# Altium PCB PA-15-30W.PcbDoc
Units mm, origin at the board's own origin, x right, y up, seen from the top; angles counter-clockwise.
Board outline 100 x 100 mm, 2 copper layers (Top Layer, Bottom Layer), stack 1.571 mm thick; 168 components, 113 nets, 477 pads, 0 vias.
Unrouted connection lines stored in the file: 358.
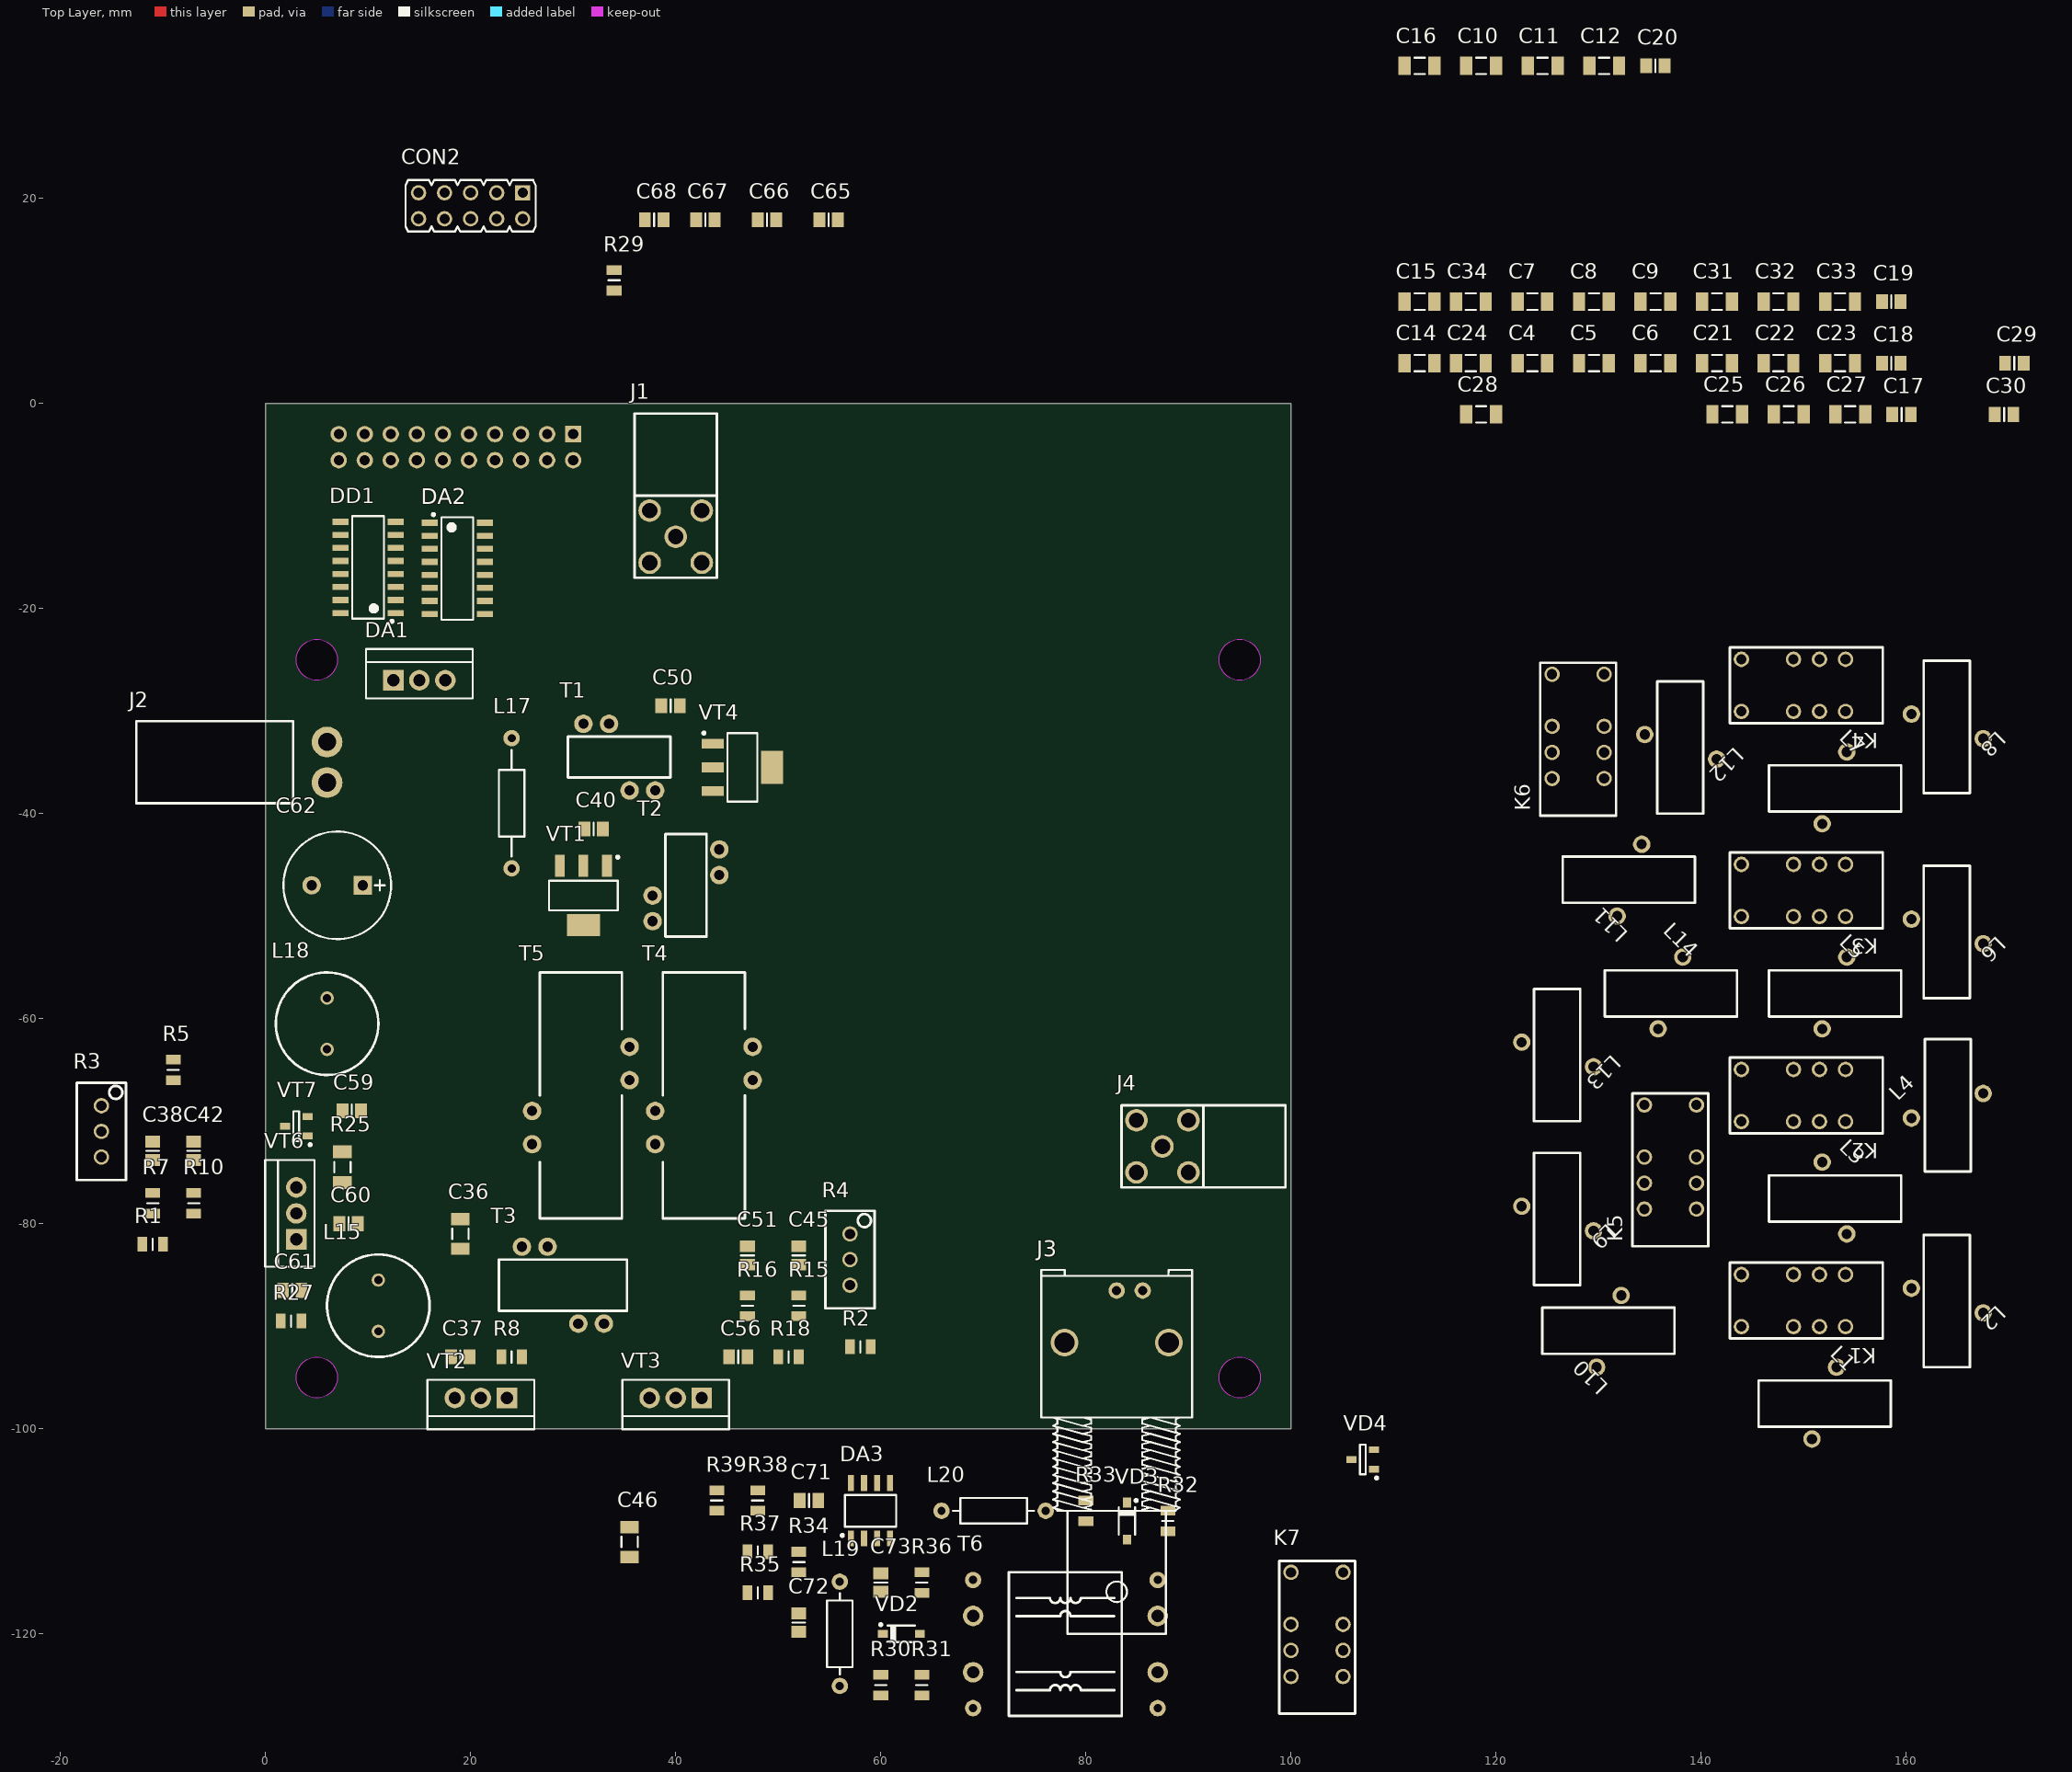
[diagram p0: Top Layer view]
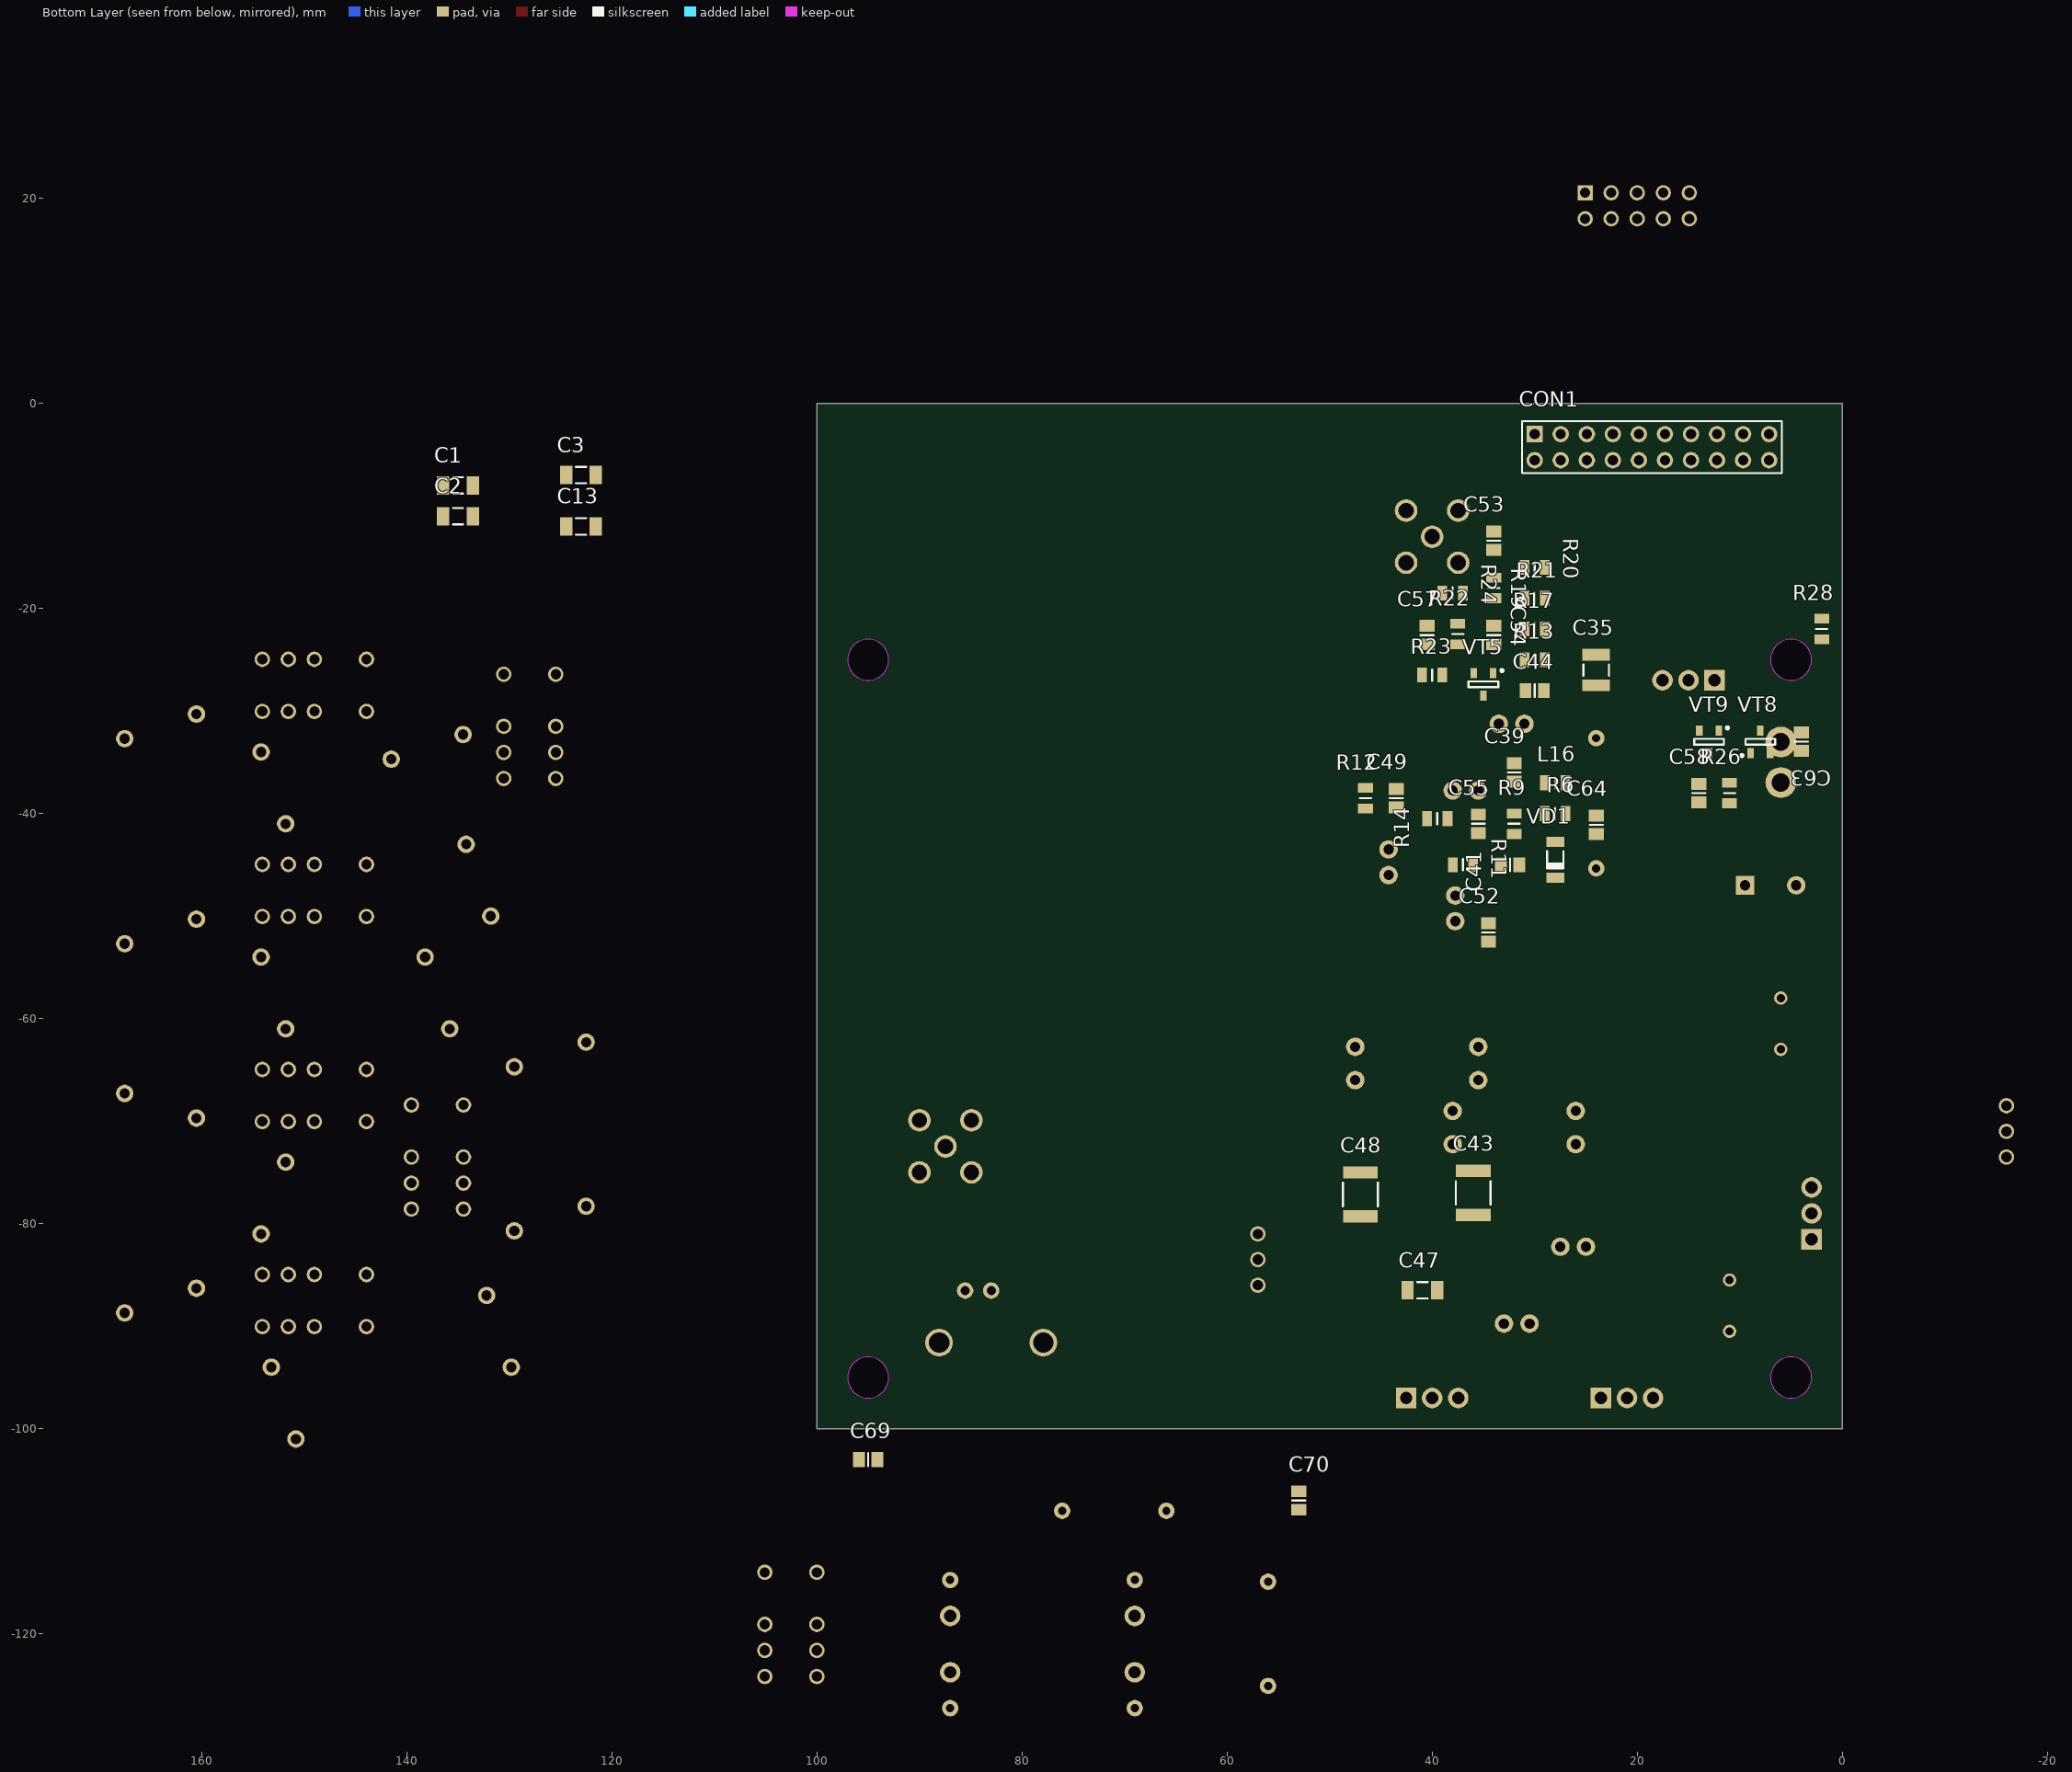
[diagram p1: Bottom Layer view, seen from below]

## Layer stack, top to bottom
Top Solder: solder mask 0.0102, Solder Resist, Dk 3.8
Top Layer: signal copper 0.0356
Dielectric 1: dielectric 1.5, FR-4, Dk 4.5
Bottom Layer: signal copper 0.0356
Bottom Solder: solder mask 0.0102, Solder Resist, Dk 3.8

## Board outline
0,0 100,0 100,-100 0,-100 0,-9.7
cut-out: 95,-27 cw(c95,-25) 93,-25 cw(c95,-25) 95,-23 cw(c95,-25) 97,-25 cw(c95,-25)
cut-out: 95,-97 cw(c95,-95) 93,-95 cw(c95,-95) 95,-93 cw(c95,-95) 97,-95 cw(c95,-95)
cut-out: 5,-97 cw(c5,-95) 3,-95 cw(c5,-95) 5,-93 cw(c5,-95) 7,-95 cw(c5,-95)
cut-out: 5,-27 cw(c5,-25) 3,-25 cw(c5,-25) 5,-23 cw(c5,-25) 7,-25 cw(c5,-25)

## Design rules (kind name [scope] priority, off if disabled: settings)
Clearance [All] p1: gap=0.254 ignorepadtopadclearanceinfootprint=FALSE except(0: Arc-Hole Track-Hole SMDPad-Hole THPad-Hole Via-Hole Fill-Hole Poly-Hole Region-Hole Text-Hole)
ComponentClearance ComponentClearance_Bln [InComponent('T4') vs InComponent('T5')] p1: gap=0 collisioncheckmode=3 verticalgap=0 showdistances=FALSE
ComponentClearance [All] p2: gap=1 collisioncheckmode=3 verticalgap=1 showdistances=TRUE donotcheckwithout3dbody=TRUE checkcomponentboundary=TRUE
PolygonConnect [All] p1: connectstyle=Relief reliefconductorwidth=0.254 reliefentries=4 polygonreliefangle="90 Angle" airgapwidth=0.254
RoutingVias [All] p1: holewidth=0.711 width=1.27 viastyle="Through Hole" minholewidth=0.711 minwidth=1.27 maxholewidth=0.711 maxwidth=1.27
SolderMaskExpansion [All] p1: expansion=0.102 istentingtop=FALSE
Width [All] p1: maxlimit=0.254 minlimit=0.254 preferedwidth=0.254
29 further rules are at their usual default settings.

## Classes and differential pairs
net class HF_LPF[0..5]: HF_LPF0 HF_LPF1 HF_LPF2 HF_LPF3 HF_LPF4 HF_LPF5
component class swr-antenna: C69 C70 C71 C72 C73 DA3 J3 J4 K7 L19 L20 R30 R31 R32 R33 R34 R35 R36 R37 R38 R39 T6 VD2 VD3 VD4
component class LPF: C1 C2 C3 C4 C5 C6 C7 C8 C9 C10 C11 C12 C13 C14 C15 C16 C17 C18 C19 C20 C21 C22 C23 C24 C25 C26 C27 C28 C29 C30 C31 C32 C33 C34 K1 K2 K3 K4 K5 K6 L1 L2 L3 L4 L5 L6 L7 L8 L9 L10 L11 L12 L13 L14
component class control-interface: C65 C66 C67 C68 CON1 CON2 DA2 DD1 R29
component class amplifier: C35 C36 C37 C38 C39 C40 C41 C42 C43 C44 C45 C46 C47 C48 C49 C50 C51 C52 C53 C54 C55 C56 C57 C58 C59 C60 C61 C62 C63 C64 DA1 J1 J2 L15 L16 L17 L18 R1 R2 R3 R4 R5 R6 R7 R8 R9 R10 R11 R12 R13 R14 R15 R16 R17 R18 R19 R20 R21 R22 R23 R24 R25 R26 R27 R28 T1 T2 T3 T4 T5 VD1 VT1 VT2 VT3 VT4 VT5 VT6 VT7 VT8 VT9

## Components (designator, comment, footprint, x,y, rotation, side; value= is the part's Value field where it differs from the comment)
C1 "1271" CAPC3216X125N 135,-8 r0 bottom
C2 "1100" CAPC3216X125N 135,-11 r180 bottom
C3 "1228" CAPC3216X125N 123,-7 r0 bottom
C4 "756.7" CAPC3216X125N 123.54,3.92 r0 top
C5 "1000" CAPC3216X125N 129.54,3.92 r0 top
C6 "386" CAPC3216X125N 135.54,3.92 r0 top
C7 "464.8" CAPC3216X125N 123.54,9.92 r0 top
C8 "470" CAPC3216X125N 129.54,9.92 r0 top
C9 "356.4" CAPC3216X125N 135.54,9.92 r0 top
C10 "288.9" CAPC3216X125N 118.54,32.92 r0 top
C11 "330" CAPC3216X125N 124.54,32.92 r0 top
C12 "199.1" CAPC3216X125N 130.54,32.92 r0 top
C13 "1271" CAPC3216X125N 123,-12 r180 bottom
C14 "756.7" CAPC3216X125N 112.54,3.92 r0 top
C15 "464.8" CAPC3216X125N 112.54,9.92 r0 top
C16 "288.9" CAPC3216X125N 112.54,32.92 r0 top
C17 "0.1uF" CAPC2013X100N 159.54,-1.08 r0 top
C18 "0.1uF" CAPC2013X100N 158.54,3.92 r0 top
C19 "0.1uF" CAPC2013X100N 158.54,9.92 r0 top
C20 "0.1uF" CAPC2013X100N 135.54,32.92 r0 top
C21 "106" CAPC3216X125N 141.54,3.92 r0 top
C22 "180" CAPC3216X125N 147.54,3.92 r0 top
C23 "8.5" CAPC3216X125N 153.54,3.92 r0 top
C24 "106" CAPC3216X125N 117.54,3.92 r0 top
C25 "171.8" CAPC3216X125N 142.54,-1.08 r0 top
C26 "220" CAPC3216X125N 148.54,-1.08 r0 top
C27 "94.6" CAPC3216X125N 154.54,-1.08 r0 top
C28 "171.8" CAPC3216X125N 118.54,-1.08 r0 top
C29 "0.1uF" CAPC2013X100N 170.54,3.92 r0 top
C30 "0.1uF" CAPC2013X100N 169.54,-1.08 r0 top
C31 "61.69" CAPC3216X125N 141.54,9.92 r0 top
C32 "100" CAPC3216X125N 147.54,9.92 r0 top
C33 "9.7" CAPC3216X125N 153.54,9.92 r0 top
C34 "61.69" CAPC3216X125N 117.54,9.92 r0 top
C35 "47uF" CAPC3225X270N 24,-26 r270 bottom
C36 "0.1uF" CAPC3216X125N 19,-81 r90 top
C37 "0.1uF" CAPC2013X100N 19,-93 r0 top
C38 "0.1uF" CAPC2013X100N -11,-72.9 r90 top
C39 "0.1uF" CAPC2013X100N 32,-36 r90 bottom
C40 "0.1uF" CAPC2013X100N 32,-41.5 r0 top
C41 "0.1uF" CAPC2013X100N 32.4,-45 r180 bottom
C42 "0.1uF" CAPC2013X100N -7,-72.9 r90 top
C43 "0.1uF" CAPC4532X218N 36,-77 r90 bottom
C44 "0.1uF" CAPC2013X100N 30,-28 r180 bottom
C45 "0.1uF" CAPC2013X100N 52,-83.1 r270 top
C46 "0.1uF" CAPC3216X125N 35.5,-111.05 r270 top
C47 "180*" CAPC3216X125N 40.95,-86.5 r180 bottom
C48 "0.1uF" CAPC4532X218N 47,-77.15 r90 bottom
C49 "0.1uF" CAPC2013X100N 43.5,-38.5 r90 bottom
C50 "0.1uF" CAPC2013X100N 39.5,-29.5 r180 top
C51 "0.1uF" CAPC2013X100N 47,-83.1 r90 top
C52 "0.1uF" CAPC2013X100N 34.5,-51.6 r270 bottom
C53 "0.1uF" CAPC2013X100N 34,-13.4 r270 bottom
C54 "0.1uF" CAPC2013X100N 34,-22.6 r270 bottom
C55 "0.1uF" CAPC2013X100N 35.5,-41 r270 bottom
C56 "0.1uF" CAPC2013X100N 46.1,-93 r0 top
C57 "0.1uF" CAPC2013X100N 40.5,-22.6 r270 bottom
C58 "0.1uF" CAPC2013X100N 14,-38 r90 bottom
C59 "0.1uF" CAPC2013X100N 8.4,-69 r0 top
C60 "0.1uF" CAPC2013X100N 8.1,-80 r0 top
C61 "0.1uF" CAPC2013X100N 2.6,-86.5 r0 top
C62 "100uF" CAPPR500-1050X1300 7,-47 r180 top
C63 "0.1uF" CAPC2013X100N 4,-33 r90 bottom
C64 "0.1uF" CAPC2013X100N 24,-41.1 r90 bottom
C65 "2.2uF" CAPC2013X100N 54.9,17.9 r180 top
C66 "0.1uF" CAPC2013X100N 48.9,17.9 r180 top
C67 "0.1uF" CAPC2013X100N 42.9,17.9 r180 top
C68 "2.2uF" CAPC2013X100N 37.9,17.9 r180 top
C69 "0.1uF" CAPC2013X100N 95,-103 r180 bottom
C70 "10uF" CAPC2013X100N 53,-107 r90 bottom
C71 "0.1uF" CAPC2013X100N 53,-107 r0 top
C72 "0.1uF" CAPC2013X100N 52,-118.9 r270 top
C73 "0.1uF" CAPC2013X100N 60,-115 r270 top
CON1 "PBD-20" PBD-20 18.57,-4.27 r180 bottom locked
CON2 "PLD-10" PLD-10 20,19.27 r180 top
DA1 "7809" TO-220-v 15,-27 r0 top
DA2 "ULN2003A" SOIC127P600X175-16N 18.7,-16.095 r0 top
DA3 "LM358" SOIC127P600X175-8N 59,-108 r90 top
DD1 "74HCT595D" SOIC127P600X175-16N 10,-16 r180 top
J1 "SMA001" SMA002 40,-13 r0 top
J2 "PWL-2" PWL-2R 6,-35 r90 top
J3 "BNC" BNC-TYCO_1-1337542-0 83,-92 r270 top
J4 "SMA002" SMA002 87.46,-72.46 r270 top
K1 "G6S-2-12VDC" G6S-2 149,-87.5 r90 top
K2 "G6S-2-12VDC" G6S-2 149,-67.5 r90 top
K3 "G6S-2-12VDC" G6S-2 149,-47.5 r90 top
K4 "G6S-2-12VDC" G6S-2 149,-27.5 r90 top
K5 "G6S-2-12VDC" G6S-2 137,-73.5 r0 top
K6 "G6S-2-12VDC" G6S-2 128,-31.5 r0 top
K7 "G6S-2-12VDC" G6S-2 102.54,-119.08 r0 top
L1 "4.375u" "T50-2 - VAR2" 152,-97.5 r180 top
L2 "4.375u" "T50-2 - VAR2" 164,-87.5 r90 top
L3 "2.604uH" T50-2 153,-77.5 r180 top
L4 "2.604uH" T50-2 164,-68.5 r270 top
L5 "1.5uH" "T50-6 - VAR2" 153,-57.5 r180 top
L6 "1.5uH" "T50-6 - VAR2" 164,-51.5 r90 top
L7 "994.9nH" "T50-6 - VAR2" 153,-37.5 r180 top
L8 "994.9nH" "T50-6 - VAR2" 164,-31.5 r90 top
L9 "342.2nH" "T50-6 - VAR2" 126,-79.5 r90 top
L10 "342.2nH" "T50-6 - VAR2" 131,-90.5 r0 top
L11 "591.3nH" "T50-6 - VAR2" 133,-46.5 r0 top
L12 "591.3nH" "T50-6 - VAR2" 138,-33.5 r90 top
L13 "199.1nH" "T50-6 - VAR2" 126,-63.5 r90 top
L14 "199.1nH" "T50-6 - VAR2" 137,-57.5 r180 top
L15 "4.7uH" "Inductor radial" 11,-88 r90 top
L16 "10uH" RESC2013X64N 28,-37 r180 bottom
L17 "3.3uH" RES1270-650X250 24,-39 r90 top
L18 "4.7uH" "Inductor radial" 6,-60.5 r270 top
L19 "100uH" RES1016-650X250 56,-120 r270 top
L20 "100uH" RES1016-650X250 71,-108 r180 top
R1 "2.2k" RESC2013X64N -11,-82 r0 top
R2 "2.2k" RESC2013X64N 58,-92 r0 top
R3 "4.7k" 3296W -16,-71 r270 top
R4 "4.7k" 3296W 57,-83.5 r270 top
R5 "6.8k" RESC2013X64N -9,-65 r90 top
R6 "330" RESC2013X64N 28,-40 r180 bottom
R7 "1k" RESC2013X64N -11,-78 r90 top
R8 "330" RESC2013X64N 24,-93 r180 top
R9 "330" RESC2013X64N 32,-41 r270 bottom
R10 "3.3*" RESC2013X64N -7,-78 r90 top
R11 "560" RESC2013X64N 37,-45 r0 bottom
R12 "560" RESC2013X64N 46.5,-38.5 r270 bottom
R13 "4.7k" RESC2013X64N 30,-25 r180 bottom
R14 "330" RESC2013X64N 39.5,-40.5 r180 bottom
R15 "1k" RESC2013X64N 52,-88 r90 top
R16 "3.3*" RESC2013X64N 47,-88 r90 top
R17 "330" RESC2013X64N 30,-22 r180 bottom
R18 "330" RESC2013X64N 51,-93 r0 top
R19 "0" RESC2013X64N 34,-18 r270 bottom
R20 "*" RESC2013X64N 30,-16 r0 bottom
R21 "*" RESC2013X64N 30,-19 r0 bottom
R22 "1k" RESC2013X64N 37.5,-22.5 r270 bottom
R23 "33" RESC2013X64N 40,-26.5 r180 bottom
R24 "47" RESC2013X64N 38,-18.5 r0 bottom
R25 "0.125" RESC3216X80N 7.5,-74.5 r90 top
R26 "100k" RESC2013X64N 11,-38 r270 bottom
R27 "4.7k" RESC2013X64N 2.5,-89.5 r0 top
R28 "100k" RESC2013X64N 2,-22 r270 bottom
R29 "10k" RESC2013X64N 34,12 r90 top
R30 "2.2k" RESC2013X64N 60,-125 r90 top
R31 "50" RESC2013X64N 64,-125 r90 top
R32 "50" RESC2013X64N 88,-109 r270 top
R33 "2.2k" RESC2013X64N 80,-108 r90 top
R34 "100" RESC2013X64N 52,-113 r90 top
R35 "22k" RESC2013X64N 48,-116 r0 top
R36 "22k" RESC2013X64N 64,-115 r270 top
R37 "*" RESC2013X64N 48,-112 r0 top
R38 "100" RESC2013X64N 48,-107 r90 top
R39 "*" RESC2013X64N 44,-107 r90 top
T1 "R10*6*4 N87" R10x6x4 34.5,-34.5 r0 top
T2 "R10*6*4 N87" R10x6x4 41,-47 r90 top
T3 "R12,5*7,5*5 N87" R12.5x7.5x5 29,-86 r0 top
T4 "TP4A-T22/14/6-C TDG" R22x14x6 42.75,-67.5 r270 top
T5 "TP4A-T22/14/6-C TDG" R22x14x6 30.75,-67.5 r90 top
T6 "BN43-302" TANDEM 78,-121 r0 top
VD1 "LL4148" DIOMELF3515N 28,-44.5 r90 bottom
VD2 "BAT46ZFILM" SOD3816X118N 62,-120 r0 top
VD3 "BAT46ZFILM" SOD3816X118N 84,-109 r270 top
VD4 "BAT54SL" SOT95P229X119-3N 107,-103 r180 top
VT1 "BFG591" SOT230P700X180-4N 31,-48 r270 top
VT2 "RD15HVF1" TO-220-v 21,-97 r180 top
VT3 "RD15HVF1" TO-220-v 40,-97 r180 top
VT4 "BFG591" SOT230P700X180-4N 46.5,-35.5 r0 top
VT5 "BFR93A" SOT95P229X119-3N 35,-27.4 r270 bottom
VT6 "IRF4905" TO-220-v 3,-79 r90 top
VT7 "MMBT3906" SOT95P229X119-3N 3,-70.5 r180 top
VT8 "IRLML9301TRP" SOT95P229X119-3N 8,-33 r90 bottom
VT9 "NX7002AK" SOT95P229X119-3N 13,-33 r270 bottom

## Footprints (in the part's own frame and the unit in brackets; to place one, negate y for a bottom-side part, rotate by r counter-clockwise, add the part's x,y. Pads: shape width x height; smd on the part's side, far side on the other; paste and mask are expansions set on the pad)
3296W [mm] "Square Trimming Potentiometer"
  round 1.5 hole 1: 1(-2.5,0) 2(0,0) 3(2.5,0)
  silkscreen extent -4.75,-2.4 4.75,2.4, body extent -4.76,-2.43 4.76,2.4, height 7.12
BNC-TYCO_1-1337542-0 [mm] "50 Ohms  BNC Elbow PCB Socket With Mounting Posts"
  round 1.6 hole 0.9: 1(-5.48,0) 2(-5.48,2.54)
  round 2.7 hole 2: 3(-0.4,5.08) 3(-0.4,-5.08)
  silkscreen extent -7.5,-7.35 28,7.35, body extent -7.5,-7.35 28,7.35, height 13.16
CAPC2013X100N [mm] "Capacitor, Non-Polarized, Chip; 2.00mm L X 1.25mm W X 0.9mm H, IPC Medium Density"
  rect 1.15x1.45 smd: 1(-0.9,0) 2(0.9,0)
  silkscreen extent 0,-0.63 0,0.63, body extent -1.1,-0.72 1.1,0.73, height 1
CAPC3216X125N [mm] "Capacitor, Non-Polarized, Chip; 3.20mm L X 1.60mm W X 1.25mm H, IPC Medium Density"
  rect 1.2x1.8 smd: 1(-1.45,0) 2(1.45,0)
  silkscreen extent -0.5,-0.8 0.5,0.8, body extent -1.7,-0.9 1.7,0.9, height 1.25
CAPC3225X270N [mm] "Chip Capacitor, Body 3.2x2.5mm, IPC Medium Density"
  rect 1.15x2.7 smd: 1(-1.5,0) 2(1.5,0)
  silkscreen extent -0.55,-1.25 0.55,1.25, body extent -1.7,-1.35 1.7,1.35, height 2.7
CAPC4532X218N [mm] "Chip Capacitor, 2-Leads, Body 4.5x3.2mm, IPC Medium Density"
  rect 1.2x3.4 smd: 1(-2.15,0) 2(2.15,0)
  silkscreen extent -1.15,-1.7 1.15,1.7, body extent -2.37,-1.7 2.38,1.7, height 2.18
CAPPR500-1050X1300 [mm] "Capacitor, Radial, Pin spacing 5.0mm - Body Diameter 10mm (nom) X Body Height 13mm (max)"
  rect 1.8x1.8 hole 1: 1(-2.5,0)
  round 1.8 hole 1: 2(2.5,0)
  silkscreen extent -5.25,-5.25 5.25,5.25, body extent -5.25,-5.25 5.25,5.25, height 13
DIOMELF3515N [mm] "SOD80C, MELF Diode, 2-Leads, Body 3.5x1.5mm, IPC Medium Density"
  rect 1x1.75 smd: 1(-1.75,0) 2(1.75,0)
  silkscreen extent -0.85,-0.8 0.85,0.8, body extent -1.85,-0.8 1.85,0.8, height 1.6
G6S-2 [mm] "Compact, Industry-Standard 2-pole relay,  designed to switch 2A Signal Loads"
  round 1.5 hole 1: 1(-2.54,5.08) 3(-2.54,0) 4(-2.54,-2.54) 5(-2.54,-5.08) 8(2.54,-5.08) 9(2.54,-2.54) 10(2.54,0) 12(2.54,5.08)
  silkscreen extent -3.7,-8.7 3.7,6.2, body extent -3.65,-8.65 3.65,6.15, height 9.2
"Inductor radial" [mm] "5.0mm"
  round 1.3 hole 0.8: 1(-2.5,0) 2(2.5,0)
  silkscreen extent -5,-5 5,5, body extent -4.25,-4.25 4.25,4.25, height 11
PBD-20 [mm] "20 Contacts - Pitch 2.54mm - Top Entry, Dual Row Through Mount Receptacle"
  rect 1.6x1.6 hole 1: 1(-11.43,1.27)
  round 1.6 hole 1: 2(-11.43,-1.27) 3(-8.89,1.27) 4(-8.89,-1.27) 5(-6.35,1.27) 6(-6.35,-1.27) 7(-3.81,1.27) 8(-3.81,-1.27) 9(-1.27,1.27) 10(-1.27,-1.27) 11(1.27,1.27) 12(1.27,-1.27) 13(3.81,1.27) 14(3.81,-1.27) 15(6.35,1.27) 16(6.35,-1.27) 17(8.89,1.27) 18(8.89,-1.27) 19(11.43,1.27) 20(11.43,-1.27)
  silkscreen extent -12.66,-2.54 12.66,2.54, body extent -12.7,-2.54 12.7,2.54, height 8.5
PLD-10 [mm] "10 Contacts - Pitch 2.54mm - Dual Row Through Mount Straight Header (Post Lead = 6.35mm, Tail Lead 3.05mm, Insulator 1.52mm)"
  rect 1.5x1.5 hole 1: 1(-5.08,-1.27)
  round 1.5 hole 1: 2(-5.08,1.27) 3(-2.54,-1.27) 4(-2.54,1.27) 5(0,-1.27) 6(0,1.27) 7(2.54,-1.27) 8(2.54,1.27) 9(5.08,-1.27) 10(5.08,1.27)
  silkscreen extent -6.35,-2.51 6.35,2.51, body extent -6.35,-2.51 6.35,2.51, height 7.87
PWL-2R [mm] "PCB Connector; Rated Voltage: 50/250V AC.DC; Rated Current: 5A"
  round 3 hole 1.75: 1(-1.98,0) 2(1.98,0)
  silkscreen extent -4,3.3 4,18.6, body extent -3.96,-0.6 3.96,18.97, height 9.6
R10x6x4 [mm]
  round 1.8 hole 1: 1(1,-3.25) 2(3.5,-3.25) 3(-1,3.25) 4(-3.5,3.25)
  silkscreen extent -5,-2 5,2, body extent -5,-2 5,2, height 10
R12.5x7.5x5 [mm]
  round 1.8 hole 1: 1(1.5,-3.75) 2(4,-3.75) 3(-1.5,3.75) 4(-4,3.75)
  silkscreen extent -6.25,-2.5 6.25,2.5, body extent -6.25,-2.5 6.25,2.5, height 12.5
R22x14x6 [mm]
  round 1.8 hole 1: 1(1.5,-4.75) 2(4.75,-4.75) 3(-1.5,4.75) 4(-4.75,4.75)
  silkscreen extent -12,-4 12,4, body extent -11,-3 11,3, height 22
RES1016-650X250 [mm] "Resistor, Axial, Pad spacing 10.16 mm - Body Lengh 6.5mm X Body Diameter 2.5mm"
  round 1.6 hole 0.8: 1(-5.08,0) 2(5.08,0)
  silkscreen extent -3.95,-1.25 3.95,1.25, body extent -5.38,-1.27 5.38,1.26, height 2.51
RES1270-650X250 [mm] "Resistor, Axial, Pad spacing 10.16 mm - Body Lengh 6.6mm X Body Diameter 2.5mm"
  round 1.6 hole 0.8: 1(-6.35,0) 2(6.35,0)
  silkscreen extent -5.2,-1.25 5.2,1.25, body extent -6.65,-1.25 6.65,1.25, height 2.5
RESC2013X64N [mm] "Chip Resistor, EIA 0805, Metric 2013, Body 2.03x1.27mm, IPC Medium Density"
  rect 0.95x1.45 smd: 1(-1,0) 2(1,0)
  silkscreen extent 0,-0.55 0,0.55, body extent -1.02,-0.63 1.02,0.64, height 0.64
RESC3216X80N [mm] "Chip Resistor, EIA 1206, Metric 3216, Body 3.2x1.6mm, IPC Medium Density"
  rect 1.25x1.85 smd: 1(-1.5,0) 2(1.5,0)
  silkscreen extent -0.5,-0.8 0.5,0.8, body extent -1.67,-0.87 1.68,0.88, height 0.8
SMA002 [mm] "SMA Connector Series"
  round 2.2 hole 1.5: 1(0,0) 2(-2.54,-2.54) 2(-2.54,2.54) 2(2.54,-2.54) 2(2.54,2.54)
  silkscreen extent -4,-4 4,12, body extent -3.17,-3.17 3.17,11.63, height 9.97
SOD3816X118N [mm] "SOD Diode (SOD-123); 2.70mm W X 1.60mm L X 1.18mm H body, IPC Medium Density"
  rect 0.95x0.8 smd: 1(-1.8,0) 2(1.8,0)
  silkscreen extent -2.12,-0.8 1.35,1.02, body extent -1.95,-0.9 1.95,0.9, height 1.18
SOIC127P600X175-8N [mm] "SOIC 8, Pitch 1.27mm - Body 4x5mm, IPC Medium Density"
  rect 1.55x0.6 smd: 1(-2.7,1.905) 2(-2.7,0.635) 3(-2.7,-0.635) 4(-2.7,-1.905) 5(2.7,-1.905) 6(2.7,-0.635) 7(2.7,0.635) 8(2.7,1.905)
  silkscreen extent -2.52,-2.5 1.55,2.88, body extent -3.1,-2.5 3.1,2.5, height 1.75
SOIC127P600X175-16N [mm] "SOIC 16, Pitch 1.27mm - Body 4x10mm, IPC Medium Density"
  rect 1.55x0.6 smd: 1(-2.7,4.445) 2(-2.7,3.175) 3(-2.7,1.905) 4(-2.7,0.635) 5(-2.7,-0.635) 6(-2.7,-1.905) 7(-2.7,-3.175) 8(-2.7,-4.445) 9(2.7,-4.445) 10(2.7,-3.175) 11(2.7,-1.905) 12(2.7,-0.635) 13(2.7,0.635) 14(2.7,1.905) 15(2.7,3.175) 16(2.7,4.445)
  silkscreen extent -2.45,-5 1.55,5.37, body extent -3.1,-5 3.1,5, height 1.75
SOT95P229X119-3N [mm] "SOT23 3-Leads, 0.95mm pitch; 3 pin, 1.296mm W X 2.858mm L X 1.194mm H body, IPC Medium Density"
  rect 1x0.65 smd: 1(-1.1,0.95) 2(-1.1,-0.95) 3(1.1,0)
  silkscreen extent -1.48,-1.45 0.28,1.92, body extent -1.25,-1.5 1.25,1.5, height 1.19
SOT230P700X180-4N [mm] "SOT223, 2.30mm pitch; 3 pin, 3.70mm W X 6.70mm L, IPC Medium Density"
  rect 2.15x0.95 smd: 1(-2.9,2.3) 2(-2.9,0) 3(-2.9,-2.3)
  rect 2.15x3.25 smd: 4(2.9,0)
  silkscreen extent -3.87,-3.35 1.45,3.48, body extent -3.65,-3.35 3.65,3.35, height 1.81
T50-2 [mm]
  round 1.7 hole 1: 1(-1.2,3.5) 2(1.2,-3.5)
  silkscreen extent -6.5,-2.2 6.4,2.3, body extent -6.5,-2.3 6.5,2.3, height 13.08
"T50-2 - VAR2" [mm]
  round 1.7 hole 1: 1(-1.2,-3.5) 2(1.2,3.5)
  silkscreen extent -6.5,-2.2 6.4,2.3, body extent -6.5,-2.3 6.5,2.3, height 13.08
"T50-6 - VAR2" [mm]
  round 1.7 hole 1: 1(-1.2,-3.5) 2(1.2,3.5)
  silkscreen extent -6.5,-2.2 6.4,2.3, body extent -6.5,-2.3 6.5,2.3, height 13.08
TANDEM [mm]
  round 2 hole 1.2: 1(-9,2.75) 2(9,2.75) 7(-9,-2.75) 8(9,-2.75)
  round 1.6 hole 0.8: 3(-9,6.25) 4(9,6.25) 5(-9,-6.25) 6(9,-6.25)
  silkscreen extent -5.5,-7 5.5,7, body extent -5.12,-6.62 5.13,6.58, height 7.55
TO-220-v [mm] "TO-220 3-Terminal - Vertical Mount"
  rect 2x2 hole 1.2: 1(-2.54,0)
  round 2 hole 1.2: 2(0,0) 3(2.54,0)
  silkscreen extent -5.21,-1.78 5.21,3.05, body extent -5.27,-1.75 5.27,2.95, height 20.5

## Part data
C1 C2 C3 C4 C5 C6 C7 C8 C9 C10 C11 C12 C13 C14 C15 C16 C21 C22 C23 C24 C25 C26 C27 C28 C31 C32 C33 C34 C47: library part Cap1206, "Capacitor 3.2x1.6 mm"
C17 C18 C19 C20 C29 C30 C37 C38 C39 C40 C41 C42 C44 C45 C49 C50 C51 C52 C53 C54 C55 C56 C57 C58 C59 C60 C61 C63 C64 C65 C66 C67 C68 C69 C70 C71 C72 C73: library part Cap0805, "Capacitor 2x1.25 mm"
C35: library part Cap1210, "GRM32ER71A476KE15L"
C36 C46: library part Cap1206, "FM31X104K251EEG"
C43: library part Cap1812, "GRM43DR72J104KW01 (1812, X7R:EIA, 0.1uF, DC630V)"
C48: library part Cap1812, "GRM43DR72J104KW01(1812, X7R:EIA, 0.1uF, DC630V)"
C62: library part CapPolarized, "EEUFR1E471"
CON1: library part CONNECTOR-20
CON2: library part CONNECTOR-10
DA1: "Positive voltage regulator ICs"
DA2: "High Voltage, High Current / Darlington Transistor Arrays"
DA3: "Single Supply Dual / Operational Amplifiers"
DD1: "8-bit serial-in, serial or parallel-out shift register with output / latches; 3-state"
J1 J4: library part "RF Connector"
J2: library part PWR_CONNECTOR
J3: library part "RF Connector", "EM-BC028M-NGP-50"
K1 K2 K3 K4 K5 K6 K7: "Compact, Industry-Standard 2-pole relay"
L1 L2 L3 L4: library part Inductor, "T50-2"
L5 L6 L7 L8 L9 L10 L11 L12 L13 L14: library part Inductor, "T50-6"
L15 L18: library part Inductor, "Bochen, 4.7µH±10%, Idc=5.0А, Rdc мax=0.05"
L16: library part Inductor, "SMD 0805 50-100mA"
L17: library part Inductor, "3,3uH ±10% аксиальный дроссель 670mA 0,34Ohm (KLS18-EC36-3R3K-A – KLS)"
L19 L20: library part Inductor, "DLA100-MN Ferrocore"
R1 R2 R5 R6 R7 R8 R9 R10 R11 R12 R13 R14 R15 R16 R17 R18 R19 R20 R21 R22 R23 R24 R26 R27 R28 R29 R30 R31 R32 R33 R34 R35 R36 R37 R38 R39: library part Res0805
R3 R4: library part potentiometer
R25: library part Res0805, "8 items 1 Om in paralel,1206"
T1: library part "transformer type 2", "R10*6*4 N87 (В64290-L38-Х87-Epcos)"
T2: library part "transformer type 1", "R10*6*4 N87 (В64290-L38-Х87-Epcos)"
T3: library part "transformer type 1", "B64290-L44-X87-Epcos"
T4 T5: library part "transformer type 2"
T6: library part "tandem match"
VD1: library part DIODE
VD2 VD3: library part DIODE, "Small signal Schottky diodes"
VD4: library part DIODE-2-1A-3C-3A-2C
VT1 VT4: "NPN 7 GHz wideband transistor"
VT5: "NPN 6 GHz wideband transistor"
VT6: "HEXFET® Power MOSFET"
VT7: "MMBT3906LT1G, PNP General Purpose Amplifier"
VT9: library part "N-MOSFET 1G 2S 3D"

## Nets (pads, with @x,y where several pads share a name; then routed paths per layer and width w, separated by ;. In a path a pad name is that pad's centre, name@x,y a point inside that pad or via, vN(x,y) a via of type N, cw(c..) or ccw(c..) an arc to the next point about the centre after c; other vN are vias at no path point)
GND: C1.1 C2.1 C3.1 C4.1 C5.1 C6.1 C7.1 C8.1 C9.1 C10.1 C11.1 C12.1 C13.1 C14.1 C15.1 C16.1 C21.1 C22.1 C23.1 C24.1 C25.1 C26.1 C27.1 C28.1 C31.1 C32.1 C33.1 C34.1 C35.1 C36.2 C38.2 C39.2 C45.1 C46.1 C52.2 C55.2 C58.2 C59.2 C60.2 C62.2 C63.1 C64.1 C65.1 C66.1 C67.1 C68.1 C70.1 C71.1 C72.2 C73.1 CON1.1 CON1.3 CON1.5 CON1.7 CON1.9 CON1.11 CON1.13 CON1.15 CON2.5 CON2.7 DA1.2 DA2.8 DA3.4 DD1.8 DD1.13 J1.2 J2.2 J3.2 J4.2 R1.1 R2.1 R20.1 R21.1 R22.1 R23.1 R24.1 R27.2 R28.1 R31.1 R32.1 R35.1 R36.2 R37.1 R39.1 T5.4 T6.3 T6.5 VD1.1 VD4.1 VD4.2 VT1.1 VT1.3 VT2.2 VT3.2 VT4.1 VT4.3 VT9.2
HF_LPF0: C17.1 DA2.11 K1.12
HF_LPF1: C18.1 DA2.12 K2.12
HF_LPF2: C19.1 DA2.13 K3.12
HF_LPF3: C20.1 DA2.14 K4.12
HF_LPF4: C30.1 DA2.15 K6.12
HF_LPF5: C29.1 DA2.16 K5.12
HF_LPF_OUT: K5.3 T6.1
HF_PA_OUT: K1.4 T4.3
HF_TX/RX: C69.1 DA2.10 K7.12
HF_TX_ENA: CON1.10 CON2.8 DA2.1 R28.2 VT9.1
NetC1_2: C1.2 K1.5 L1.1
NetC2_2: C2.2 C3.2 L1.2 L2.1
NetC4_2: C4.2 K2.5 L3.2
NetC5_2: C5.2 C6.2 L3.1 L4.2
NetC7_2: C7.2 K3.5 L5.1
NetC8_2: C8.2 C9.2 L5.2 L6.1
NetC10_2: C10.2 K4.5 L7.1
NetC11_2: C11.2 C12.2 L7.2 L8.1
NetC13_2: C13.2 K1.8 L2.2
NetC14_2: C14.2 K2.8 L4.1
NetC15_2: C15.2 K3.8 L6.2
NetC16_2: C16.2 K4.8 L8.2
NetC21_2: C21.2 K5.5 L9.1
NetC22_2: C22.2 C23.2 L9.2 L10.1
NetC24_2: C24.2 K5.8 L10.2
NetC25_2: C25.2 K6.5 L11.1
NetC26_2: C26.2 C27.2 L11.2 L12.1
NetC28_2: C28.2 K6.8 L12.2
NetC31_2: C31.2 K5.4 L13.1
NetC32_2: C32.2 C33.2 L13.2 L14.1
NetC34_2: C34.2 K5.9 L14.2
NetC36_1: C36.1 C46.2 L15.1 T3.2 T3.4
NetC37_1: C37.1 C43.1 C47.2 T3.3 VT2.3
NetC37_2: C37.2 R8.2
NetC38_1: C38.1 R3.2 R7.2
NetC39_1: C39.1 L16.1 T1.1
NetC40_1: C40.1 C41.2 R9.2 VT1.2
NetC40_2: C40.2 T1.2
NetC41_1: C41.1 R11.1
NetC42_1: C42.1 R10.2
NetC42_2: C42.2 R11.2 T2.3 VT1.4
NetC43_2: C43.2 T4.2 T5.2
NetC44_1: C44.1 R13.1 T1.4 VT5.3
NetC44_2: C44.2 R13.2 R17.2
NetC45_2: C45.2 R4.2 R15.2
NetC47_1: C47.1 C48.1 C56.1 T3.1 VT3.3
NetC48_2: C48.2 T4.1 T5.1
NetC49_1: C49.1 C50.1 R14.1 VT4.2
NetC49_2: C49.2 R12.1
NetC50_2: C50.2 T1.3
NetC51_1: C51.1 R16.2
NetC51_2: C51.2 R12.2 T2.1 VT4.4
NetC52_1: C52.1 L17.1 T2.2 T2.4
NetC53_1: C53.1 J1.1
NetC53_2: C53.2 R19.1 R20.2
NetC54_1: C54.1 R19.2 R21.2
NetC54_2: C54.2 R17.1 R22.2 VT5.1
NetC55_1: C55.1 R6.1 R9.1 R14.2 VD1.2
NetC56_2: C56.2 R18.1
NetC57_1: C57.1 R24.2
NetC57_2: C57.2 R23.2 VT5.2
NetC59_1: C59.1 L18.2 R25.2 VT7.2
NetC61_1: C61.1 R25.1 VT6.3 VT7.1
NetC61_2: C61.2 R27.1 VT6.1 VT7.3
NetC63_2: C63.2 DA1.1 VT8.3
NetC72_1: C72.1 DA3.3 L19.1 R35.2
NetC73_2: C73.2 DA3.5 L20.2 R36.1
NetCON1_12: CON1.12 R38.2 R39.2
NetCON1_14: CON1.14 R34.2 R37.2
NetDA3_1: DA3.1 DA3.2 R34.1
NetDA3_6: DA3.6 DA3.7 R38.1
NetJ3_1: J3.1 K7.4 K7.9
NetJ4_1: J4.1 K7.3 K7.10 VD4.3
NetK1_3: K1.3 K1.10
NetK1_9: K1.9 K2.4
NetK2_3: K2.3 K2.10
NetK2_9: K2.9 K3.4
NetK3_3: K3.3 K3.10
NetK3_9: K3.9 K4.4
NetK4_3: K4.3 K4.10
NetK4_9: K4.9 K6.9
NetK5_10: K5.10 K6.4
NetK6_3: K6.3 K6.10
NetK7_5: K7.5 K7.8 T6.2 T6.6
NetL19_2: L19.2 R30.1
NetL20_1: L20.1 R33.1
NetR1_2: R1.2 R3.3
NetR2_2: R2.2 R4.3
NetR3_1: R3.1 R4.1 R5.1
NetR7_1: R7.1 R8.1 R10.1 VT2.1
NetR15_1: R15.1 R16.1 R18.2 VT3.1
NetR26_1: R26.1 VT8.1 VT9.3
NetR30_2: R30.2 VD2.1
NetR31_2: R31.2 T6.7 VD2.2
NetR32_2: R32.2 T6.4 T6.8 VD3.2
NetR33_2: R33.2 VD3.1
NetT4_4: T4.4 T5.3
Q1: DA2.7 DD1.1
Q2: DA2.6 DD1.2
Q3: DA2.5 DD1.3
Q4: DA2.4 DD1.4
Q5: DA2.3 DD1.5
Q6: DA2.2 DD1.6
RCK: CON1.4 CON2.2 DD1.12
SER_IN: CON1.2 CON2.1 DD1.14
SR_OUT: CON2.6 DD1.9
SRCK: CON1.6 CON2.3 DD1.11
SRCLR: CON1.8 CON2.4 DD1.10 R29.1
V5V0: C65.2 C66.2 C67.2 C68.2 C70.2 C71.2 CON1.17 CON1.18 CON1.19 CON1.20 CON2.9 CON2.10 DA3.8 DD1.16 R29.2
V9V0: C35.2 C64.2 DA1.3 L16.2 L17.2 R5.2 R6.2
V12V0: C17.2 C18.2 C19.2 C20.2 C29.2 C30.2 C58.1 C62.1 C69.2 DA2.9 J2.1 K1.1 K2.1 K3.1 K4.1 K5.1 K6.1 K7.1 L18.1 R26.2 VT8.2
VPWR: C60.1 L15.2 VT6.2
pads on no net: CON1.16 DD1.7 DD1.15 J3.3